# Altium PCB WUT-YJ-4-3-1.PcbDoc (part 11 of 11)
Units mm, origin at the board's own origin, x right, y up, seen from the top; angles counter-clockwise.
Board outline 85 x 56 mm, 4 copper layers (Top Layer, GND_Plane, 3V3_Plane, Bottom Layer); 182 components, 321 nets, 1106 pads, 360 vias.
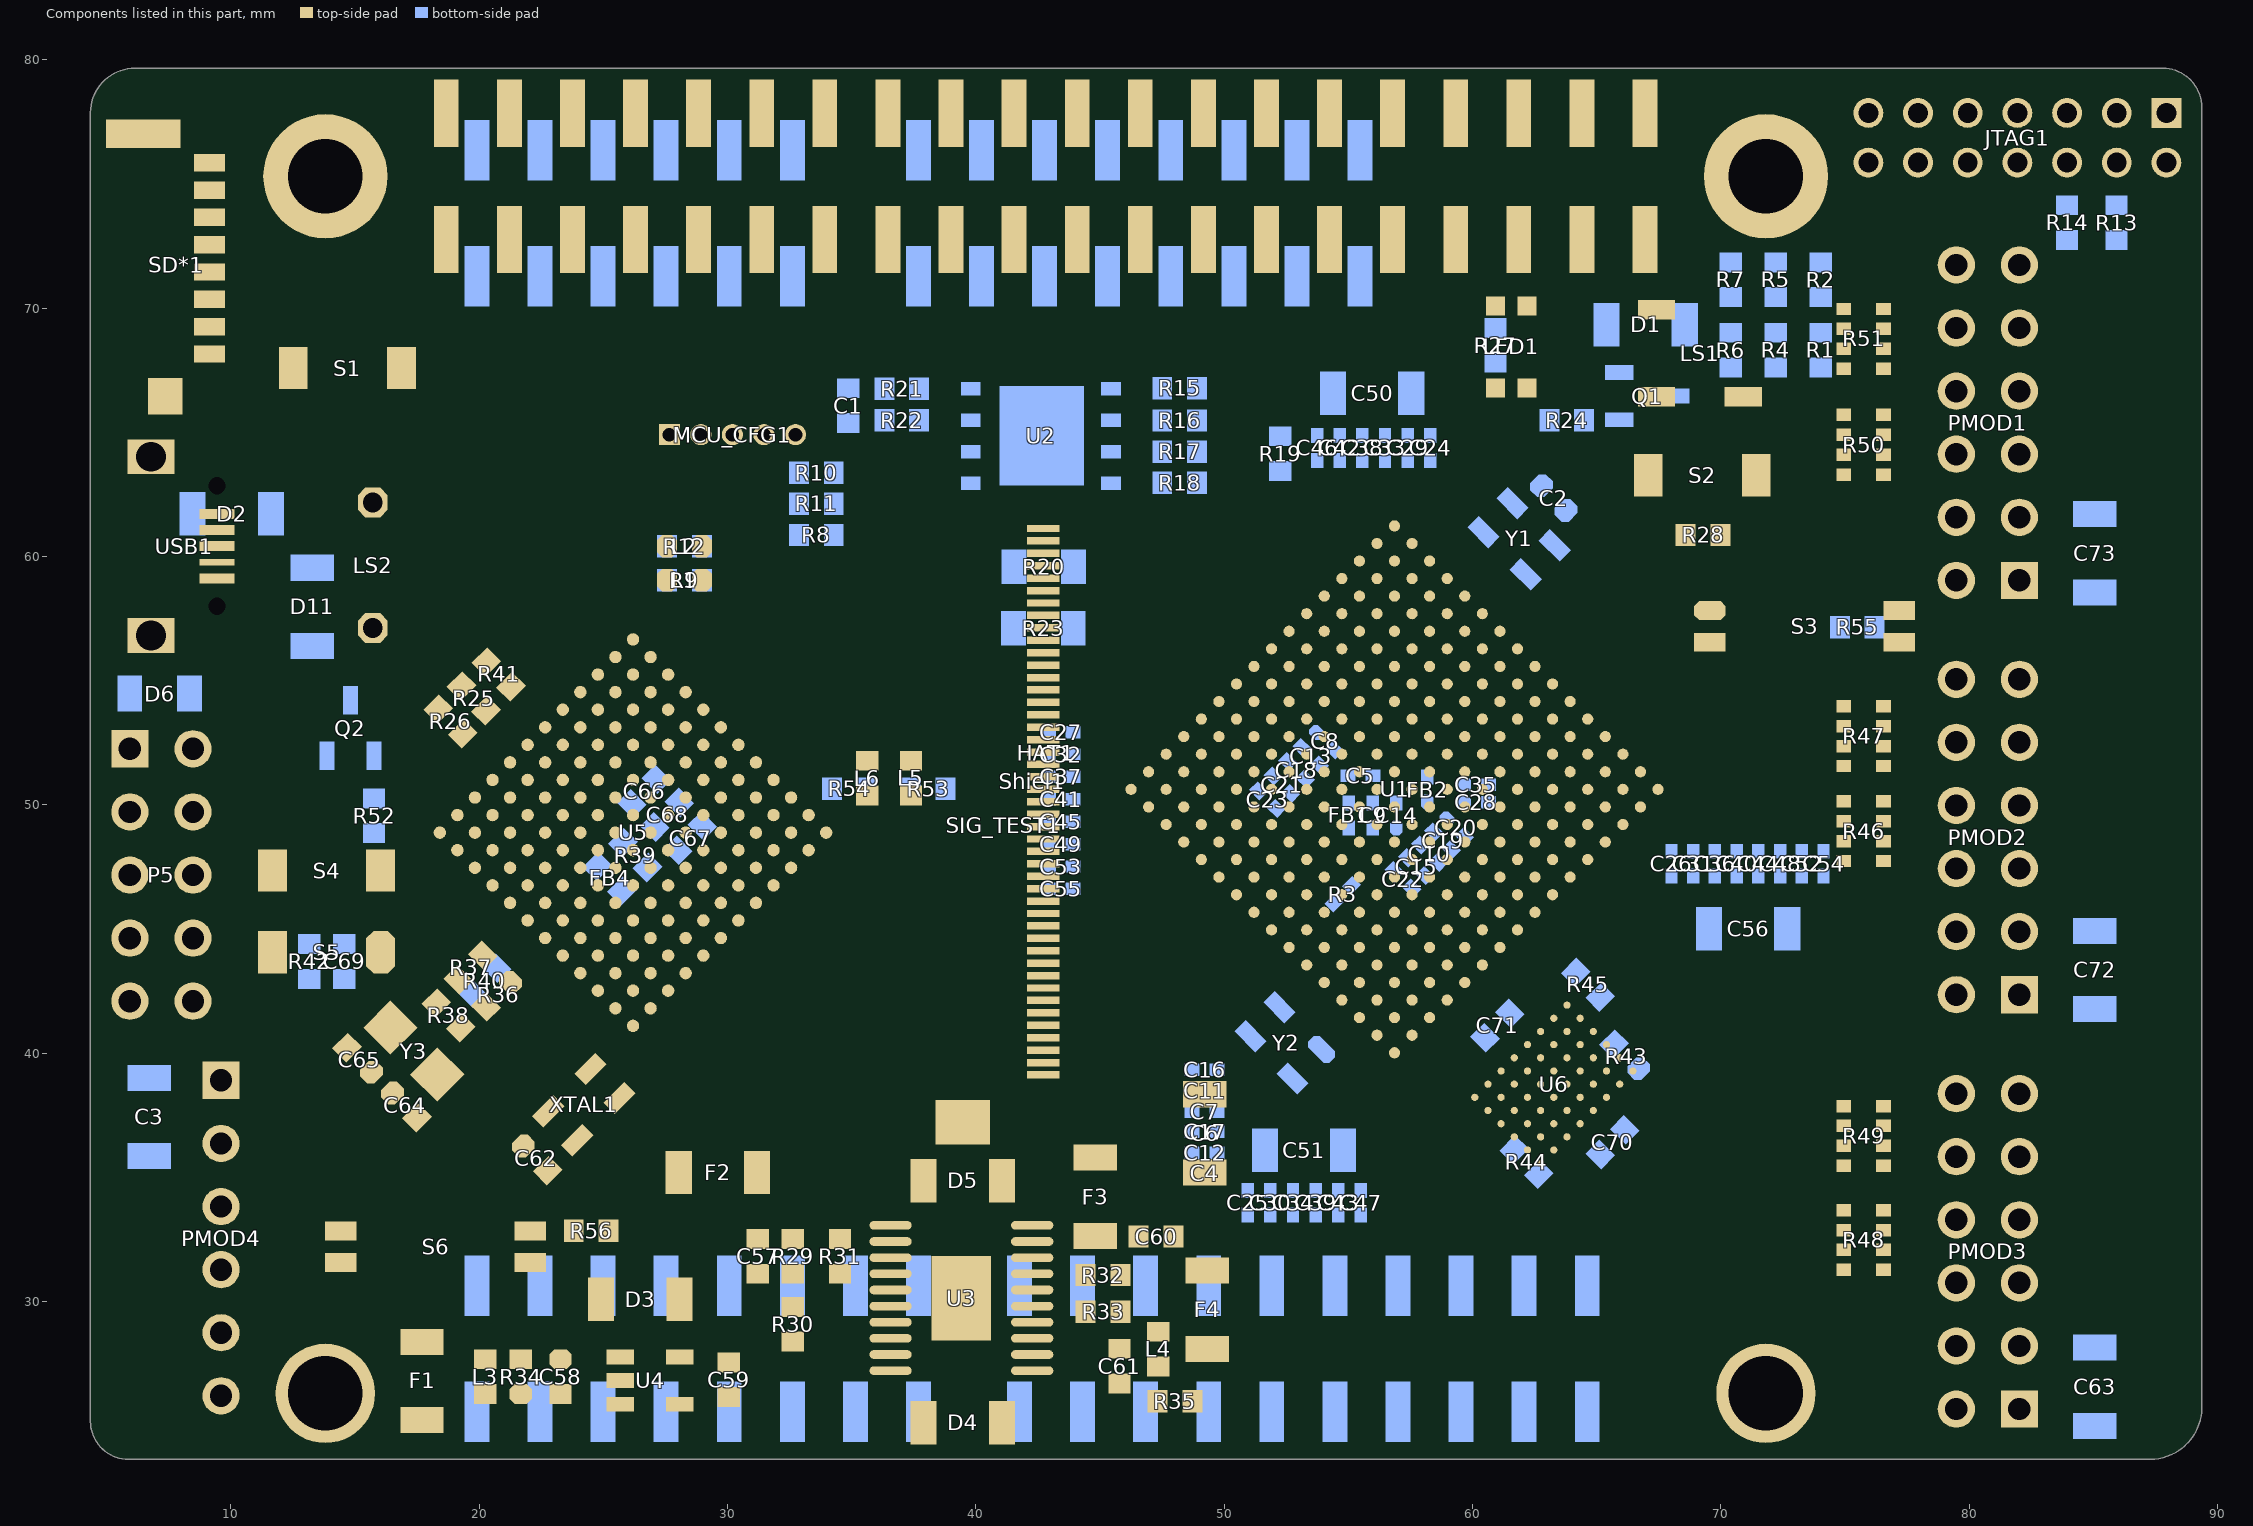
[diagram p13: the components of this part, seen from the top]

## Via types
v1: diameter 0.45, hole 0.2, Top Layer to Bottom Layer, tented both sides, 280 vias
v2: diameter 0.61, hole 0.33, Top Layer to Bottom Layer, tented both sides, 40 vias
v3: diameter 0.403, hole 0.2, Top Layer to Bottom Layer, tented both sides, 15 vias
v4: diameter 0.5, hole 0.2, Top Layer to Bottom Layer, tented both sides, 12 vias
v5: diameter 0.864, hole 0.508, Top Layer to Bottom Layer, tented both sides, 11 vias
v6: diameter 0.864, hole 0.381, Top Layer to Bottom Layer, tented both sides, 1 vias
v7: diameter 0.864, hole 0.356, Top Layer to Bottom Layer, tented both sides, 1 vias

## Nets (pads, with @x,y where several pads share a name; then routed paths per layer and width w, separated by ;. In a path a pad name is that pad's centre, name@x,y a point inside that pad or via, vN(x,y) a via of type N, cw(c..) or ccw(c..) an arc to the next point about the centre after c; other vN are vias at no path point) (continued)
copper on no net: (continued)
  Top Layer w0.025: 88.303,68.195 88.303,68.356 ; 88.303,68.754 88.303,68.813 ; 88.303,69.236 88.303,69.245 ; 88.303,70.481 88.303,70.692 ; 88.328,46.046 88.328,46.41 ; 88.328,47.646 88.328,47.832 ; 88.328,47.9 88.328,48.163 ; 88.328,49.094 88.328,49.356 ; 88.328,49.653 88.328,49.763 ; 88.328,50.948 88.328,51.084 ; 88.328,52.218 88.328,52.328 ; 88.328,52.879 88.328,53.039 ; 88.328,53.818 88.328,53.979 ; 88.328,55.317 88.328,55.529 ; 88.328,58.517 88.328,60.304 ; 88.328,64.537 88.328,64.673 ; 88.328,65.655 88.328,65.79 ; 88.328,67.839 88.328,68 ; 88.328,68.068 88.328,68.102 ; 88.328,68.195 88.328,68.356 ; 88.328,70.506 88.328,70.667 ; 88.354,46.046 88.354,46.385 ; 88.354,47.672 88.354,48.163 ; 88.354,49.094 88.354,49.356 ; 88.354,49.653 88.354,49.763 ; 88.354,50.923 88.354,51.084 ; 88.354,52.218 88.354,52.328 ; 88.354,52.904 88.354,53.09 ; 88.354,53.818 88.354,54.005 ; 88.354,55.317 88.354,55.529 ; 88.354,58.517 88.354,60.304 ; 88.354,64.537 88.354,64.673 ; 88.354,65.655 88.354,65.79 ; 88.354,67.865 88.354,68 ; 88.354,68.068 88.354,68.356 ; 88.354,70.532 88.354,70.642 ; 88.379,46.046 88.379,46.385 ; 88.379,47.697 88.379,48.137 ; 88.379,49.119 88.379,49.356 ; 88.379,49.653 88.379,49.763 ; 88.379,50.923 88.379,51.058 ; 88.379,52.218 88.379,52.328 ; 88.379,52.929 88.379,53.116 ; 88.379,53.818 88.379,54.03 ; 88.379,55.317 88.379,55.503 ; 88.379,58.517 88.379,60.304 ; 88.379,64.563 88.379,64.673 ; 88.379,65.655 88.379,65.79 ; 88.379,67.89 88.379,68 ; 88.379,68.093 88.379,68.356 ; 88.379,70.532 88.379,70.591 ; 88.405,46.071 88.405,46.359 ; 88.405,47.722 88.405,48.137 ; 88.405,49.119 88.405,49.331 ; 88.405,49.653 88.405,49.788 ; 88.405,50.72 88.405,50.779 ; 88.405,50.872 88.405,51.058 ; 88.405,52.244 88.405,52.303 ; 88.405,52.955 88.405,53.192 ; 88.405,53.818 88.405,54.055 ; 88.405,55.317 88.405,55.478 ; 88.405,58.543 88.405,59.339 ; 88.405,59.737 88.405,60.304 ; 88.405,64.563 88.405,64.673 ; 88.405,65.655 88.405,65.79 ; 88.405,67.915 88.405,67.949 ; 88.405,68.093 88.405,68.356 ; 88.43,46.097 88.43,46.334 ; 88.43,47.722 88.43,48.137 ; 88.43,49.119 88.43,49.331 ; 88.43,49.678 88.43,49.788 ; 88.43,50.745 88.43,51.058 ; 88.43,52.98 88.43,53.268 ; 88.43,53.818 88.43,54.055 ; 88.43,55.317 88.43,55.452 ; 88.43,58.543 88.43,59.059 ; 88.43,60.041 88.43,60.304 ; 88.43,64.588 88.43,64.647 ; 88.43,65.655 88.43,65.79 ; 88.43,68.093 88.43,68.356 ; 88.456,46.122 88.456,46.334 ; 88.456,47.773 88.456,48.137 ; 88.456,49.145 88.456,49.331 ; 88.456,49.678 88.456,49.788 ; 88.456,50.77 88.456,51.058 ; 88.456,53.006 88.456,53.37 ; 88.456,53.768 88.456,54.055 ; 88.456,55.317 88.456,55.452 ; 88.456,58.594 88.456,58.932 ; 88.456,64.613 88.456,64.647 ; 88.456,65.655 88.456,65.79 ; 88.456,68.119 88.456,68.356 ; 88.481,46.148 88.481,46.308 ; 88.481,47.799 88.481,48.137 ; 88.481,49.145 88.481,49.306 ; 88.481,49.704 88.481,49.788 ; 88.481,50.796 88.481,51.058 ; 88.481,53.031 88.481,53.395 ; 88.481,53.539 88.481,53.573 ; 88.481,53.691 88.481,54.055 ; 88.481,55.292 88.481,55.427 ; 88.481,58.619 88.481,58.831 ; 88.481,65.655 88.481,65.79 ; 88.481,68.119 88.481,68.356 ; 88.506,46.173 88.506,46.308 ; 88.506,47.849 88.506,48.112 ; 88.506,49.17 88.506,49.306 ; 88.506,49.704 88.506,49.788 ; 88.506,50.796 88.506,51.033 ; 88.506,53.056 88.506,54.055 ; 88.506,55.292 88.506,55.402 ; 88.506,65.655 88.506,65.79 ; 88.506,68.119 88.506,68.356 ; 88.532,46.224 88.532,46.283 ; 88.532,47.9 88.532,48.112 ; 88.532,49.17 88.532,49.306 ; 88.532,49.729 88.532,49.788 ; 88.532,50.821 88.532,51.033 ; 88.532,53.082 88.532,54.055 ; 88.532,55.266 88.532,55.376 ; 88.532,65.655 88.532,65.765 ; 88.532,68.144 88.532,68.33 ; 88.557,47.951 88.557,48.086 ; 88.557,49.196 88.557,49.306 ; 88.557,49.754 88.557,49.763 ; 88.557,50.847 88.557,51.033 ; 88.557,53.133 88.557,54.03 ; 88.557,55.241 88.557,55.351 ; 88.557,65.655 88.557,65.765 ; 88.557,68.144 88.557,68.33 ; 88.582,49.221 88.582,49.28 ; 88.582,50.847 88.582,51.007 ; 88.582,53.183 88.582,54.03 ; 88.582,55.215 88.582,55.325 ; 88.582,65.655 88.582,65.765 ; 88.582,68.169 88.582,68.33 ; 88.608,49.272 88.608,49.28 ; 88.608,50.872 88.608,51.007 ; 88.608,53.234 88.608,54.005 ; 88.608,55.19 88.608,55.3 ; 88.608,65.68 88.608,65.765 ; 88.608,68.169 88.608,68.33 ; 88.633,50.872 88.633,50.982 ; 88.633,53.285 88.633,53.979 ; 88.633,55.19 88.633,55.275 ; 88.633,65.68 88.633,65.765 ; 88.633,68.22 88.633,68.33 ; 88.659,50.897 88.659,50.982 ; 88.659,53.336 88.659,53.928 ; 88.659,55.165 88.659,55.249 ; 88.659,65.706 88.659,65.765 ; 88.659,68.246 88.659,68.33 ; 88.684,50.897 88.684,50.957 ; 88.684,53.412 88.684,53.878 ; 88.684,55.139 88.684,55.224 ; 88.684,65.706 88.684,65.739 ; 88.684,68.296 88.684,68.305 ; 88.709,53.539 88.709,53.725 ; 88.709,55.114 88.709,55.198 ; 88.735,55.088 88.735,55.148 ; 88.76,55.063 88.76,55.122 ; 88.786,55.088 88.786,55.097
  Top Layer w0.051: 50.961,29.934 51.283,29.934 ; 50.961,29.985 51.435,29.985 ; 50.961,30.035 51.791,30.035 ; 51.012,30.086 51.791,30.086 ; 51.113,30.797 51.384,30.797 ; 51.113,30.848 51.384,30.848 ; 51.164,28.765 51.689,28.765 ; 51.164,28.816 51.486,28.816 ; 51.164,28.867 51.384,28.867 ; 51.164,28.918 51.384,28.918 ; 51.164,28.969 51.435,28.969 ; 51.164,29.019 51.435,29.019 ; 51.164,29.07 51.486,29.07 ; 51.164,30.137 51.74,30.137 ; 51.164,30.696 51.486,30.696 ; 51.164,30.747 51.435,30.747 ; 51.164,30.899 51.333,30.899 ; 51.215,28.715 52.299,28.715 ; 51.215,29.121 51.486,29.121 ; 51.215,29.172 51.537,29.172 ; 51.215,30.594 51.537,30.594 ; 51.215,30.645 51.486,30.645 ; 51.266,28.664 53.213,28.664 ; 51.266,29.223 51.537,29.223 ; 51.266,29.273 51.587,29.273 ; 51.266,30.493 51.587,30.493 ; 51.266,30.543 51.537,30.543 ; 51.316,29.324 51.587,29.324 ; 51.316,29.375 51.638,29.375 ; 51.316,30.188 51.638,30.188 ; 51.316,30.391 51.587,30.391 ; 51.316,30.442 51.587,30.442 ; 51.367,28.613 53.67,28.613 ; 51.367,29.426 51.638,29.426 ; 51.367,29.477 51.689,29.477 ; 51.367,30.29 51.587,30.29 ; 51.367,30.34 51.587,30.34 ; 51.418,29.527 51.689,29.527 ; 51.469,29.578 51.74,29.578 ; 51.469,29.629 51.74,29.629 ; 51.52,29.68 51.791,29.68 ; 51.52,29.731 51.791,29.731 ; 51.52,29.781 51.791,29.781 ; 51.52,29.985 51.841,29.985 ; 51.57,28.562 53.721,28.562 ; 51.57,29.832 51.841,29.832 ; 51.57,29.883 51.841,29.883 ; 51.57,29.934 51.841,29.934 ; 51.875,30.29 52.451,30.29 ; 51.875,30.34 53.416,30.34 ; 51.875,30.391 53.416,30.391 ; 51.875,30.696 52.553,30.696 ; 51.926,28.867 52.502,28.867 ; 51.926,28.918 53.365,28.918 ; 51.926,28.969 53.518,28.969 ; 51.926,29.019 53.518,29.019 ; 51.926,29.07 52.197,29.07 ; 51.926,29.121 52.197,29.121 ; 51.926,29.172 52.197,29.172 ; 51.926,29.223 52.197,29.223 ; 51.926,29.273 52.197,29.273 ; 51.926,29.324 52.197,29.324 ; 51.926,29.375 52.349,29.375 ; 51.926,29.426 53.518,29.426 ; 51.926,29.477 53.518,29.477 ; 51.926,29.527 53.467,29.527 ; 51.926,29.578 53.416,29.578 ; 51.926,29.629 52.197,29.629 ; 51.926,29.68 52.197,29.68 ; 51.926,29.731 52.146,29.731 ; 51.926,29.781 52.197,29.781 ; 51.926,29.832 52.908,29.832 ; 51.926,29.883 53.416,29.883 ; 51.926,29.934 53.416,29.934 ; 51.926,29.985 53.416,29.985 ; 51.926,30.035 52.146,30.035 ; 51.926,30.086 52.146,30.086 ; 51.926,30.137 52.146,30.137 ; 51.926,30.188 52.146,30.188 ; 51.926,30.239 52.146,30.239 ; 51.926,30.442 53.365,30.442 ; 51.926,30.594 52.146,30.594 ; 51.926,30.645 52.349,30.645 ; 51.926,30.747 52.807,30.747 ; 51.977,28.816 52.146,28.816 ; 52.028,30.797 53.01,30.797 ; 52.129,28.511 53.721,28.511 ; 52.282,30.848 53.213,30.848 ; 52.332,30.493 53.264,30.493 ; 52.383,29.07 53.518,29.07 ; 52.485,30.899 53.264,30.899 ; 52.739,30.95 53.264,30.95 ; 52.79,30.035 53.416,30.035 ; 52.891,29.629 53.213,29.629 ; 52.942,31.001 53.264,31.001 ; 52.993,28.461 53.67,28.461 ; 53.145,30.29 53.416,30.29 ; 53.196,29.832 53.416,29.832 ; 53.196,30.086 53.467,30.086 ; 53.196,30.137 53.467,30.137 ; 53.196,30.188 53.467,30.188 ; 53.196,30.239 53.467,30.239 ; 53.247,29.121 53.518,29.121 ; 53.247,29.375 53.518,29.375 ; 53.298,29.172 53.518,29.172 ; 53.298,29.223 53.518,29.223 ; 53.298,29.273 53.518,29.273 ; 53.298,29.324 53.518,29.324 ; 54.11,28.562 54.432,28.562 ; 54.11,28.613 54.483,28.613 ; 54.11,29.883 54.534,29.883 ; 54.11,29.934 54.432,29.934 ; 54.11,29.985 54.331,29.985 ; 54.161,28.511 54.331,28.511 ; 54.161,28.664 54.534,28.664 ; 54.161,29.832 54.635,29.832 ; 54.161,30.34 56.667,30.34 ; 54.161,30.391 56.718,30.391 ; 54.161,30.442 56.718,30.442 ; 54.212,28.715 54.585,28.715 ; 54.212,29.781 54.686,29.781 ; 54.212,30.29 54.94,30.29 ; 54.263,28.765 54.686,28.765 ; 54.314,28.816 54.737,28.816 ; 54.314,29.731 54.788,29.731 ; 54.415,28.867 54.788,28.867 ; 54.415,29.68 54.839,29.68 ; 54.466,28.918 54.839,28.918 ; 54.466,29.629 54.889,29.629 ; 54.517,28.969 54.889,28.969 ; 54.568,29.019 54.94,29.019 ; 54.568,29.578 54.94,29.578 ; 54.568,30.493 56.718,30.493 ; 54.618,29.07 54.94,29.07 ; 54.618,29.527 54.94,29.527 ; 54.669,29.121 54.991,29.121 ; 54.669,29.477 54.991,29.477 ; 54.72,29.172 54.991,29.172 ; 54.72,29.223 54.991,29.223 ; 54.72,29.375 54.991,29.375 ; 54.72,29.426 54.991,29.426 ; 54.771,29.273 54.991,29.273 ; 54.771,29.324 54.991,29.324 ; 55.126,30.899 55.397,30.899 ; 55.126,30.95 55.397,30.95 ; 55.177,30.086 55.448,30.086 ; 55.177,30.137 55.448,30.137 ; 55.177,30.188 55.448,30.188 ; 55.177,30.239 55.448,30.239 ; 55.177,30.29 55.448,30.29 ; 55.177,30.543 55.448,30.543 ; 55.177,30.594 55.448,30.594 ; 55.177,30.645 55.448,30.645 ; 55.177,30.696 55.448,30.696 ; 55.177,30.747 55.397,30.747 ; 55.177,30.797 55.397,30.797 ; 55.177,30.848 55.397,30.848 ; 55.177,31.001 55.397,31.001 ; 55.228,29.223 55.499,29.223 ; 55.228,29.273 55.499,29.273 ; 55.228,29.324 55.499,29.324 ; 55.228,29.375 55.499,29.375 ; 55.228,29.426 55.499,29.426 ; 55.228,29.477 55.499,29.477 ; 55.228,29.527 55.499,29.527 ; 55.228,29.578 55.499,29.578 ; 55.228,29.629 55.499,29.629 ; 55.228,29.68 55.499,29.68 ; 55.228,29.731 55.499,29.731 ; 55.228,29.781 55.499,29.781 ; 55.228,29.832 55.499,29.832 ; 55.228,29.883 55.499,29.883 ; 55.228,29.934 55.448,29.934 ; 55.228,29.985 55.448,29.985 ; 55.228,30.035 55.448,30.035 ; 55.228,31.051 55.347,31.051 ; 55.279,28.41 55.55,28.41 ; 55.279,28.461 55.55,28.461 ; 55.279,28.511 55.55,28.511 ; 55.279,28.562 55.55,28.562 ; 55.279,28.613 55.55,28.613 ; 55.279,28.664 55.55,28.664 ; 55.279,28.715 55.55,28.715 ; 55.279,28.765 55.55,28.765 ; 55.279,28.816 55.55,28.816 ; 55.279,28.867 55.55,28.867 ; 55.279,28.918 55.55,28.918 ; 55.279,28.969 55.55,28.969 ; 55.279,29.019 55.499,29.019 ; 55.279,29.07 55.499,29.07 ; 55.279,29.121 55.499,29.121 ; 55.279,29.172 55.499,29.172 ; 55.33,28.359 55.55,28.359 ; 55.685,29.07 56.007,29.07 ; 55.685,29.121 55.956,29.121 ; 55.685,29.172 55.956,29.172 ; 55.685,29.223 55.956,29.223 ; 55.685,29.273 55.956,29.273 ; 55.685,29.324 55.956,29.324 ; 55.685,29.375 56.007,29.375 ; 55.736,28.969 56.21,28.969 ; 55.736,29.019 56.109,29.019 ; 55.736,29.426 56.007,29.426 ; 55.736,29.477 56.058,29.477 ; 55.787,29.527 56.109,29.527 ; 55.787,29.578 56.159,29.578 ; 55.838,28.918 56.312,28.918 ; 55.838,29.629 56.21,29.629 ; 55.888,28.867 56.464,28.867 ; 55.888,29.68 56.261,29.68 ; 55.939,29.731 56.312,29.731 ; 55.939,30.899 56.363,30.899 ; 55.939,30.95 56.261,30.95 ; 55.939,31.001 56.159,31.001 ; 55.99,28.816 56.566,28.816 ; 55.99,29.781 56.413,29.781 ; 55.99,30.848 56.464,30.848 ; 56.041,30.797 56.566,30.797 ; 56.092,28.765 56.718,28.765 ; 56.092,29.832 56.464,29.832 ; 56.142,29.883 56.515,29.883 ; 56.142,30.747 56.617,30.747 ; 56.193,28.715 56.82,28.715 ; 56.193,29.934 56.566,29.934 ; 56.244,29.985 56.566,29.985 ; 56.244,30.696 56.667,30.696 ; 56.295,30.035 56.566,30.035 ; 56.346,28.664 56.82,28.664 ; 56.346,30.086 56.515,30.086 ; 56.346,30.645 56.667,30.645 ; 56.447,28.613 56.82,28.613 ; 56.447,30.594 56.617,30.594 ; 56.6,28.562 56.769,28.562 ; 57.209,28.765 59.766,28.765 ; 57.209,28.816 59.817,28.816 ; 57.26,28.715 58.699,28.715 ; 57.26,28.867 59.868,28.867 ; 57.514,29.223 59.563,29.223 ; 57.514,29.273 59.563,29.273 ; 57.514,29.324 59.563,29.324 ; 57.514,29.375 59.563,29.375 ; 57.514,29.426 57.785,29.426 ; 57.514,29.477 57.785,29.477 ; 57.514,29.527 57.785,29.527 ; 57.514,29.578 57.785,29.578 ; 57.514,29.629 57.785,29.629 ; 57.514,29.68 57.785,29.68 ; 57.514,29.731 57.785,29.731 ; 57.514,29.781 57.785,29.781 ; 57.514,29.832 57.785,29.832 ; 57.514,29.883 57.785,29.883 ; 57.514,29.934 57.785,29.934 ; 57.514,29.985 57.785,29.985 ; 57.514,30.035 57.785,30.035 ; 57.514,30.086 57.785,30.086 ; 57.514,30.137 57.785,30.137 ; 57.514,30.188 58.496,30.188 ; 57.514,30.239 59.614,30.239 ; 57.514,30.29 59.563,30.29 ; 57.514,30.34 59.512,30.34 ; 57.565,30.391 57.734,30.391 ; 57.616,29.172 58.039,29.172 ; 58.022,29.68 58.903,29.68 ; 58.022,29.731 59.106,29.731 ; 58.022,29.781 59.157,29.781 ; 58.022,29.832 59.106,29.832 ; 58.073,28.918 59.817,28.918 ; 58.174,30.848 58.445,30.848 ; 58.174,30.899 58.445,30.899 ; 58.174,30.95 58.445,30.95 ; 58.174,31.001 58.445,31.001 ; 58.174,31.051 58.395,31.051 ; 58.225,30.543 58.496,30.543 ; 58.225,30.594 58.852,30.594 ; 58.225,30.645 59.512,30.645 ; 58.225,30.696 59.563,30.696 ; 58.225,30.747 59.563,30.747 ; 58.225,30.797 58.496,30.797 ; 58.276,30.391 59.411,30.391 ; 58.276,30.442 58.547,30.442 ; 58.276,30.493 58.496,30.493 ; 58.378,28.969 58.649,28.969 ; 58.378,29.019 58.649,29.019 ; 58.378,29.07 58.649,29.07 ; 58.378,29.121 58.649,29.121 ; 58.378,29.172 58.649,29.172 ; 58.428,28.359 58.699,28.359 ; 58.428,28.41 58.699,28.41 ; 58.428,28.461 58.699,28.461 ; 58.428,28.511 58.699,28.511 ; 58.428,28.562 58.699,28.562 ; 58.428,28.613 58.699,28.613 ; 58.428,28.664 58.699,28.664 ; 58.479,28.308 58.649,28.308 ; 58.682,29.883 59.055,29.883 ; 58.682,30.797 59.563,30.797 ; 59.292,29.121 59.512,29.121 ; 59.292,29.172 59.563,29.172 ; 59.292,29.426 59.563,29.426 ; 59.292,30.188 59.614,30.188 ; 59.343,29.477 59.563,29.477 ; 59.343,29.527 59.614,29.527 ; 59.343,29.578 59.614,29.578 ; 59.343,29.629 59.614,29.629 ; 59.343,29.68 59.614,29.68 ; 59.343,29.731 59.614,29.731 ; 59.343,29.781 59.614,29.781 ; 59.343,30.137 59.614,30.137 ; 59.394,29.832 59.614,29.832 ; 59.394,29.883 59.665,29.883 ; 59.394,29.934 59.665,29.934 ; 59.394,29.985 59.665,29.985 ; 59.394,30.035 59.665,30.035 ; 59.394,30.086 59.665,30.086 ; 59.495,28.969 59.766,28.969 ; 60.257,28.41 60.528,28.41 ; 60.257,28.461 60.528,28.461 ; 60.257,29.578 60.681,29.578 ; 60.257,29.629 61.087,29.629 ; 60.257,29.68 61.493,29.68 ; 60.308,28.359 60.528,28.359 ; 60.308,28.511 60.528,28.511 ; 60.308,28.562 60.579,28.562 ; 60.308,28.613 60.579,28.613 ; 60.308,28.664 62.357,28.664 ; 60.308,28.715 61.9,28.715 ; 60.308,29.731 61.849,29.731 ; 60.359,28.765 61.392,28.765 ; 60.359,28.816 61.087,28.816 ; 60.359,28.867 60.63,28.867 ; 60.359,28.918 60.63,28.918 ; 60.359,30.391 62.408,30.391 ; 60.359,30.442 61.493,30.442 ; 60.41,28.969 60.681,28.969 ; 60.41,29.019 60.681,29.019 ; 60.41,29.07 60.681,29.07 ; 60.41,29.121 60.681,29.121 ; 60.41,29.172 60.681,29.172 ; 60.41,30.34 62.916,30.34 ; 60.46,29.223 60.731,29.223 ; 60.46,29.273 60.731,29.273 ; 60.46,29.324 61.798,29.324 ; 60.46,29.375 61.443,29.375 ; 60.46,30.493 61.443,30.493 ; 60.511,29.426 60.681,29.426 ; 60.562,29.781 61.849,29.781 ; 60.714,30.29 61.036,30.29 ; 60.714,30.543 60.985,30.543 ; 60.714,30.594 60.985,30.594 ; 60.714,30.645 60.985,30.645 ; 60.714,30.696 60.985,30.696 ; 60.714,30.747 60.985,30.747 ; 60.714,30.797 60.985,30.797 ; 60.714,30.848 60.985,30.848 ; 60.765,28.613 62.865,28.613 ; 60.765,29.527 61.036,29.527 ; 60.765,29.578 61.036,29.578 ; 60.765,29.832 61.849,29.832 ; 60.765,29.883 61.036,29.883 ; 60.765,29.934 61.036,29.934 ; 60.765,29.985 61.036,29.985 ; 60.765,30.035 61.036,30.035 ; 60.765,30.086 61.036,30.086 ; 60.765,30.137 61.036,30.137 ; 60.765,30.188 61.036,30.188 ; 60.765,30.239 60.985,30.239 ; 60.765,30.899 60.935,30.899 ; 60.816,28.867 61.087,28.867 ; 60.816,28.918 61.087,28.918 ; 60.816,28.969 61.087,28.969 ; 60.816,29.019 61.087,29.019 ; 60.816,29.07 61.087,29.07 ; 60.816,29.121 61.087,29.121 ; 60.816,29.172 61.138,29.172 ; 60.816,29.223 61.798,29.223 ; 60.816,29.273 61.798,29.273 ; 60.816,29.426 61.036,29.426 ; 60.816,29.477 61.036,29.477 ; 61.222,28.562 63.017,28.562 ; 61.375,29.883 61.493,29.883 ; 61.527,29.07 61.798,29.07 ; 61.527,29.121 61.798,29.121 ; 61.527,29.172 61.798,29.172 ; 61.527,29.375 62.408,29.375 ; 61.527,29.426 62.408,29.426 ; 61.578,28.969 62.205,28.969 ; 61.578,29.019 62.205,29.019 ; 61.578,29.477 61.798,29.477 ; 61.578,29.527 61.849,29.527 ; 61.578,29.578 61.849,29.578 ; 61.578,29.629 61.849,29.629 ; 61.578,29.68 61.849,29.68 ; 61.578,30.29 62.967,30.29 ; 61.629,28.918 62.205,28.918 ; 61.629,29.883 61.9,29.883 ; 61.629,29.934 61.9,29.934 ; 61.629,29.985 61.9,29.985 ; 61.629,30.035 61.9,30.035 ; 61.629,30.086 61.9,30.086 ; 61.629,30.137 61.9,30.137 ; 61.629,30.239 62.967,30.239 ; 61.629,30.442 61.798,30.442 ; 61.68,28.867 62.103,28.867 ; 61.68,30.188 61.9,30.188 ; 61.73,28.511 63.017,28.511 ; 61.883,29.324 62.459,29.324 ; 61.934,29.477 62.408,29.477 ; 61.984,29.527 62.459,29.527 ; 62.035,29.07 62.154,29.07 ; 62.035,30.188 62.967,30.188 ; 62.035,30.442 62.306,30.442 ; 62.035,30.493 62.306,30.493 ; 62.035,30.543 62.306,30.543 ; 62.035,30.594 62.306,30.594 ; 62.035,30.645 62.306,30.645 ; 62.035,30.696 62.306,30.696 ; 62.035,30.747 62.306,30.747 ; 62.035,30.797 62.306,30.797 ; 62.035,30.848 62.306,30.848 ; 62.035,30.899 62.306,30.899 ; 62.035,30.95 62.306,30.95 ; 62.035,31.001 62.306,31.001 ; 62.035,31.051 62.255,31.051 ; 62.086,29.578 62.56,29.578 ; 62.086,29.68 62.713,29.68 ; 62.086,29.731 62.814,29.731 ; 62.086,29.781 62.865,29.781 ; 62.086,29.832 62.357,29.832 ; 62.086,29.883 62.357,29.883 ; 62.086,29.934 62.357,29.934 ; 62.086,29.985 62.357,29.985 ; 62.086,30.035 62.357,30.035 ; 62.086,30.086 62.306,30.086 ; 62.086,30.137 62.306,30.137 ; 62.137,29.629 62.611,29.629 ; 62.188,29.223 62.509,29.223 ; 62.188,29.273 62.459,29.273 ; 62.238,28.461 63.017,28.461 ; 62.238,29.121 62.56,29.121 ; 62.238,29.172 62.509,29.172 ; 62.289,29.019 62.967,29.019 ; 62.289,29.07 62.56,29.07 ; 62.34,28.969 62.967,28.969 ; 62.391,28.918 62.916,28.918 ; 62.391,30.848 62.763,30.848 ; 62.391,30.899 62.713,30.899 ; 62.442,28.867 62.865,28.867 ; 62.442,30.797 62.763,30.797 ; 62.442,30.95 62.662,30.95 ; 62.492,29.832 62.865,29.832 ; 62.492,30.747 62.814,30.747 ; 62.543,28.816 62.763,28.816 ; 62.543,30.696 62.865,30.696 ; 62.594,29.883 62.865,29.883 ; 62.594,30.645 62.916,30.645 ; 62.645,30.594 62.967,30.594 ; 62.696,29.07 62.967,29.07 ; 62.696,29.934 62.865,29.934 ; 62.696,30.543 63.017,30.543 ; 62.746,28.41 62.967,28.41 ; 62.746,30.493 63.068,30.493 ; 62.797,29.121 62.865,29.121 ; 62.797,30.391 63.017,30.391 ; 62.797,30.442 63.068,30.442 ; 63.661,29.934 63.983,29.934 ; 63.661,29.985 63.932,29.985 ; 63.661,30.035 63.932,30.035 ; 63.661,30.086 63.932,30.086 ; 63.661,30.137 63.932,30.137 ; 63.661,30.188 63.932,30.188 ; 63.661,30.239 63.932,30.239 ; 63.661,30.29 63.932,30.29 ; 63.661,30.34 63.932,30.34 ; 63.661,30.391 63.932,30.391 ; 63.712,28.867 64.389,28.867 ; 63.712,28.918 63.983,28.918 ; 63.712,28.969 63.983,28.969 ; 63.712,29.019 64.338,29.019 ; 63.712,29.781 64.338,29.781 ; 63.712,29.832 63.983,29.832 ; 63.712,29.883 63.983,29.883 ; 63.712,30.442 63.983,30.442 ; 63.712,30.493 64.338,30.493 ; 63.712,30.543 64.338,30.543 ; 63.762,28.765 64.338,28.765 ; 63.762,28.816 64.338,28.816 ; 63.762,29.07 64.338,29.07 ; 63.762,29.121 64.287,29.121 ; 63.762,29.68 64.287,29.68 ; 63.762,29.731 64.338,29.731 ; 63.762,30.594 64.287,30.594 ; 63.813,28.715 64.287,28.715 ; 63.813,29.172 64.287,29.172 ; 63.813,30.645 64.237,30.645 ; 63.864,30.696 64.186,30.696 ; 63.915,28.664 64.186,28.664 ; 63.915,29.223 64.186,29.223 ; 63.966,29.477 64.237,29.477 ; 63.966,30.747 64.084,30.747 ; 64.016,29.426 64.237,29.426 ; 64.016,29.527 64.287,29.527 ; 64.016,29.578 64.287,29.578 ; 64.016,29.629 64.287,29.629 ; 64.067,29.832 64.338,29.832 ; 64.067,29.883 64.389,29.883 ; 64.067,30.442 64.338,30.442 ; 64.118,28.918 64.389,28.918 ; 64.118,28.969 64.389,28.969 ; 64.118,29.934 64.389,29.934 ; 64.118,29.985 64.389,29.985 ; 64.118,30.035 64.389,30.035 ; 64.118,30.086 64.389,30.086 ; 64.118,30.137 64.389,30.137 ; 64.118,30.188 64.389,30.188 ; 64.118,30.239 64.389,30.239 ; 64.118,30.29 64.389,30.29 ; 64.118,30.34 64.389,30.34 ; 64.118,30.391 64.389,30.391 ; 66.76,29.934 67.081,29.934 ; 66.76,29.985 67.031,29.985 ; 66.76,30.035 67.031,30.035 ; 66.76,30.086 67.031,30.086 ; 66.76,30.137 67.031,30.137 ; 66.76,30.188 67.031,30.188 ; 66.76,30.239 67.031,30.239 ; 66.76,30.29 67.031,30.29 ; 66.76,30.34 67.031,30.34 ; 66.76,30.391 67.031,30.391 ; 66.81,28.867 67.488,28.867 ; 66.81,28.918 67.081,28.918 ; 66.81,28.969 67.081,28.969 ; 66.81,29.019 67.437,29.019 ; 66.81,29.781 67.437,29.781 ; 66.81,29.832 67.081,29.832 ; 66.81,29.883 67.081,29.883 ; 66.81,30.442 67.081,30.442 ; 66.81,30.493 67.437,30.493 ; 66.81,30.543 67.437,30.543 ; 66.861,28.765 67.437,28.765 ; 66.861,28.816 67.437,28.816 ; 66.861,29.07 67.437,29.07 ; 66.861,29.121 67.386,29.121 ; 66.861,29.68 67.386,29.68 ; 66.861,29.731 67.437,29.731 ; 66.861,30.594 67.386,30.594 ; 66.912,28.715 67.386,28.715 ; 66.912,29.172 67.386,29.172 ; 66.912,30.645 67.335,30.645 ; 66.963,30.696 67.285,30.696 ; 67.014,28.664 67.285,28.664 ; 67.014,29.223 67.285,29.223 ; 67.064,29.477 67.335,29.477 ; 67.064,30.747 67.183,30.747 ; 67.115,29.426 67.335,29.426 ; 67.115,29.527 67.386,29.527 ; 67.115,29.578 67.386,29.578 ; 67.115,29.629 67.386,29.629 ; 67.166,29.832 67.437,29.832 ; 67.166,29.883 67.488,29.883 ; 67.166,30.442 67.437,30.442 ; 67.217,28.918 67.488,28.918 ; 67.217,28.969 67.488,28.969 ; 67.217,29.934 67.488,29.934 ; 67.217,29.985 67.488,29.985 ; 67.217,30.035 67.488,30.035 ; 67.217,30.086 67.488,30.086 ; 67.217,30.137 67.488,30.137 ; 67.217,30.188 67.488,30.188 ; 67.217,30.239 67.488,30.239 ; 67.217,30.29 67.488,30.29 ; 67.217,30.34 67.488,30.34 ; 67.217,30.391 67.488,30.391 ; 69.858,29.934 70.18,29.934 ; 69.858,29.985 70.129,29.985 ; 69.858,30.035 70.129,30.035 ; 69.858,30.086 70.129,30.086 ; 69.858,30.137 70.129,30.137 ; 69.858,30.188 70.129,30.188 ; 69.858,30.239 70.129,30.239 ; 69.858,30.29 70.129,30.29 ; 69.858,30.34 70.129,30.34 ; 69.858,30.391 70.129,30.391 ; 69.909,28.867 70.587,28.867 ; 69.909,28.918 70.18,28.918 ; 69.909,28.969 70.18,28.969 ; 69.909,29.019 70.536,29.019 ; 69.909,29.781 70.536,29.781 ; 69.909,29.832 70.18,29.832 ; 69.909,29.883 70.18,29.883 ; 69.909,30.442 70.18,30.442 ; 69.909,30.493 70.536,30.493 ; 69.909,30.543 70.536,30.543 ; 69.96,28.765 70.536,28.765 ; 69.96,28.816 70.536,28.816 ; 69.96,29.07 70.536,29.07 ; 69.96,29.121 70.485,29.121 ; 69.96,29.68 70.485,29.68 ; 69.96,29.731 70.536,29.731 ; 69.96,30.594 70.485,30.594 ; 70.011,28.715 70.485,28.715 ; 70.011,29.172 70.485,29.172 ; 70.011,30.645 70.434,30.645 ; 70.062,30.696 70.383,30.696 ; 70.112,28.664 70.383,28.664 ; 70.112,29.223 70.383,29.223 ; 70.163,29.477 70.434,29.477 ; 70.163,30.747 70.282,30.747 ; 70.214,29.426 70.434,29.426 ; 70.214,29.527 70.485,29.527 ; 70.214,29.578 70.485,29.578 ; 70.214,29.629 70.485,29.629 ; 70.265,29.832 70.536,29.832 ; 70.265,29.883 70.587,29.883 ; 70.265,30.442 70.536,30.442 ; 70.316,28.918 70.587,28.918 ; 70.316,28.969 70.587,28.969 ; 70.316,29.934 70.587,29.934 ; 70.316,29.985 70.587,29.985 ; 70.316,30.035 70.587,30.035 ; 70.316,30.086 70.587,30.086 ; 70.316,30.137 70.587,30.137 ; 70.316,30.188 70.587,30.188 ; 70.316,30.239 70.587,30.239 ; 70.316,30.29 70.587,30.29 ; 70.316,30.34 70.587,30.34 ; 70.316,30.391 70.587,30.391
  Top Layer w0.127: 51.393,26.759 53.34,26.759 ; 51.393,26.886 52.959,26.886 ; 51.393,27.013 52.578,27.013 ; 51.52,25.362 53.594,25.362 ; 51.647,26.632 51.816,26.632 ; 51.774,25.489 52.324,25.489 ; 51.901,25.235 53.467,25.235 ; 52.028,25.616 52.324,25.616 ; 52.028,25.743 52.324,25.743 ; 52.028,25.87 52.324,25.87 ; 52.028,25.997 52.324,25.997 ; 52.028,26.124 52.324,26.124 ; 52.028,26.251 52.324,26.251 ; 52.028,26.632 53.467,26.632 ; 52.155,24.981 52.959,24.981 ; 52.155,25.108 53.213,25.108 ; 52.155,26.378 52.451,26.378 ; 52.155,26.505 52.451,26.505 ; 52.282,24.854 52.832,24.854 ; 52.79,25.489 53.721,25.489 ; 53.044,25.616 53.721,25.616 ; 53.171,25.743 53.848,25.743 ; 53.171,26.505 53.594,26.505 ; 53.298,25.87 53.848,25.87 ; 53.425,25.997 53.848,25.997 ; 53.425,26.124 53.848,26.124 ; 53.552,26.251 53.848,26.251 ; 53.552,26.378 53.721,26.378 ; 54.06,26.759 56.007,26.759 ; 54.06,26.886 55.626,26.886 ; 54.06,27.013 55.245,27.013 ; 54.187,25.362 56.261,25.362 ; 54.314,26.632 54.483,26.632 ; 54.441,25.489 54.991,25.489 ; 54.568,25.235 56.134,25.235 ; 54.695,25.616 54.991,25.616 ; 54.695,25.743 54.991,25.743 ; 54.695,25.87 54.991,25.87 ; 54.695,25.997 54.991,25.997 ; 54.695,26.124 54.991,26.124 ; 54.695,26.251 54.991,26.251 ; 54.695,26.632 56.134,26.632 ; 54.822,24.981 55.626,24.981 ; 54.822,25.108 55.88,25.108 ; 54.822,26.378 55.118,26.378 ; 54.822,26.505 55.118,26.505 ; 54.949,24.854 55.499,24.854 ; 55.457,25.489 56.388,25.489 ; 55.711,25.616 56.388,25.616 ; 55.838,25.743 56.515,25.743 ; 55.838,26.505 56.261,26.505 ; 55.965,25.87 56.515,25.87 ; 56.092,25.997 56.515,25.997 ; 56.092,26.124 56.515,26.124 ; 56.219,26.251 56.515,26.251 ; 56.219,26.378 56.388,26.378 ; 56.981,25.235 57.404,25.235 ; 56.981,25.362 57.404,25.362 ; 56.981,25.489 57.404,25.489 ; 57.108,24.981 57.404,24.981 ; 57.108,25.108 57.404,25.108 ; 57.108,25.616 57.404,25.616 ; 57.108,25.743 57.912,25.743 ; 57.108,25.87 58.039,25.87 ; 57.108,25.997 57.531,25.997 ; 57.108,26.124 57.531,26.124 ; 57.108,26.251 57.531,26.251 ; 57.108,26.378 57.531,26.378 ; 57.108,26.505 57.531,26.505 ; 57.108,26.632 57.658,26.632 ; 57.108,27.013 57.531,27.013 ; 57.235,24.854 57.404,24.854 ; 57.235,26.759 57.658,26.759 ; 57.235,26.886 57.531,26.886 ; 57.235,27.14 57.404,27.14 ; 57.616,25.616 58.166,25.616 ; 57.743,25.489 58.293,25.489 ; 57.87,25.362 58.42,25.362 ; 57.87,25.997 58.166,25.997 ; 57.997,25.235 58.674,25.235 ; 57.997,26.124 58.293,26.124 ; 57.997,26.251 58.42,26.251 ; 58.124,26.378 58.801,26.378 ; 58.251,25.108 58.801,25.108 ; 58.251,26.505 58.801,26.505 ; 58.251,26.632 58.928,26.632 ; 58.378,24.981 58.928,24.981 ; 58.378,26.759 58.928,26.759 ; 58.505,26.886 58.928,26.886 ; 58.632,24.854 58.928,24.854 ; 58.632,27.013 58.801,27.013

## Polygon pours and split planes (outlines as drawn)
GND on GND_Plane (split plane): 87.928,79.143 88.063,79.116 88.194,79.071 88.319,79.01 88.434,78.933 88.538,78.842 88.629,78.738 88.706,78.623 88.767,78.498 88.812,78.367 88.839,78.232 88.847,78.107 88.846,78.093 88.846,25.729 88.847,25.714 88.838,25.554 88.809,25.382 88.76,25.214 88.693,25.052 88.609,24.899 88.507,24.756 88.391,24.625 88.26,24.509 88.118,24.407 87.964,24.323 87.803,24.256 87.634,24.207 87.462,24.178 87.302,24.169 87.287,24.171 5.88,24.171 5.867,24.169 5.748,24.177 5.617,24.203 5.491,24.246 5.372,24.305 5.262,24.378 5.162,24.466 5.074,24.566 5.001,24.676 4.942,24.795 4.899,24.921 4.873,25.052 4.865,25.171 4.867,25.184 4.867,77.876 4.865,77.889 4.873,78.019 4.897,78.16 4.936,78.298 4.991,78.43 5.06,78.555 5.143,78.671 5.238,78.778 5.345,78.873 5.461,78.956 5.587,79.025 5.719,79.08 5.856,79.12 5.997,79.144 6.127,79.151 6.14,79.15 87.789,79.15 87.803,79.151
3V3 on 3V3_Plane (split plane): 87.928,79.143 88.063,79.116 88.194,79.071 88.319,79.01 88.434,78.933 88.538,78.842 88.629,78.738 88.706,78.623 88.767,78.498 88.812,78.367 88.839,78.232 88.847,78.107 88.846,78.093 88.846,25.729 88.847,25.714 88.838,25.554 88.809,25.382 88.76,25.214 88.693,25.052 88.609,24.899 88.507,24.756 88.391,24.625 88.26,24.509 88.118,24.407 87.964,24.323 87.803,24.256 87.634,24.207 87.462,24.178 87.302,24.169 87.287,24.171 5.88,24.171 5.867,24.169 5.748,24.177 5.617,24.203 5.491,24.246 5.372,24.305 5.262,24.378 5.162,24.466 5.074,24.566 5.001,24.676 4.942,24.795 4.899,24.921 4.873,25.052 4.865,25.171 4.867,25.184 4.867,77.876 4.865,77.889 4.873,78.019 4.897,78.16 4.936,78.298 4.991,78.43 5.06,78.555 5.143,78.671 5.238,78.778 5.345,78.873 5.461,78.956 5.587,79.025 5.719,79.08 5.856,79.12 5.997,79.144 6.127,79.151 6.14,79.15 87.789,79.15 87.803,79.151

## Keep-outs
Keep-Out Layer:
  the board outline again, w0.254

## Other copper
Top Layer:
  rectangle net GND: 26.505,25.514 30.493,26.543
  rectangle net GND: 26.505,25.616 29.4,27.127

## Silkscreen, mask and mechanical layers (free items; w line width, h text height)
Top Overlay:
  drawing of 731 lines, arcs and shapes, not listed
  text "BANK34" at 15.151,78.257 h0.76
  text "5V" at 18.301,75.819 h0.76
  text "PL-N14" at 25.298,75.809 h0.76
  text "PL-N13" at 27.953,75.809 h0.76
  text "PL-P15" at 30.378,75.809 h0.76
  text "PL-T15" at 35.408,75.809 h0.76
  text "PL-T14" at 38.011,75.809 h0.76
  text "PL-T13" at 42.901,75.809 h0.76
  text "PL-R12" at 45.771,75.806 h0.76
  text "PL-T12" at 48.362,75.806 h0.76
  text "PL-P11" at 50.876,75.809 h0.76
  text "PL-T10" at 55.842,75.806 h0.76
  text "PL-P9" at 60.896,75.806 h0.76
  text "PL-T8" at 63.449,75.809 h0.76
  text "PL-R8" at 65.888,75.809 h0.76
  text "5V" at 20.841,75.781 h0.76
  text "GND" at 41.008,75.565 h0.76
  text "PS-E0" at 5.728,75.527 h0.76
  text "GND" at 28.296,75.108 h0.76
  text "GND" at 48.641,75.108 h0.76
  text "GND" at 66.396,75.095 h0.76
  text "GND" at 33.363,75.032 h0.76
  text "GND" at 53.734,75.019 h0.76
  text "GND" at 58.826,75.019 h0.76
  text "GND" at 23.228,74.993 h0.76
  text "PS-E1" at 5.728,74.433 h0.76
  text "3V3" at 18.148,74.27 h0.76
  text "3V3" at 38.456,74.295 h0.76
  text "PL-R15" at 35.458,74.245 h0.76
  text "PL-M16" at 20.066,74.244 h0.76
  text "PL-M14" at 22.809,74.238 h0.76
  text "PL-N16" at 25.311,74.244 h0.76
  text "PL-P16" at 30.124,74.244 h0.76
  text "PL-R16" at 32.995,74.244 h0.76
  text "PL-P14" at 40.653,74.238 h0.76
  text "PL-P13" at 43.205,74.243 h0.76
  text "PL-R13" at 45.707,74.243 h0.76
  text "PL-N12" at 50.47,74.238 h0.76
  text "PL-R11" at 53.213,74.238 h0.76
  text "PL-P10" at 55.918,74.242 h0.76
  text "PL-R10" at 58.56,74.242 h0.76
  text "PL-T9" at 61.163,74.244 h0.76
  text "PL-N9" at 63.462,74.244 h0.76
  text "GND" at 6.261,73.114 h0.76 r90
  text "PS-E2" at 5.728,72.245 h0.76
  text "PL-P6" at 84.1,71.514 h0.76
  text "PL-P8" at 86.604,71.514 h0.76
  text "PL-M12" at 68.161,71.183 h0.76
  text "3V3" at 6.261,70.917 h0.76 r90
  text "B" at 62.014,70.65 h0.76
  text "PS-E3" at 5.728,70.056 h0.76
  text "May the Force be with You ! ! !" at 13.525,69.532 h2.54
  text "PS-E4" at 5.728,68.962 h0.76
  text "PL-T5" at 84.124,68.974 h0.76
  text "PL-T7" at 86.604,68.968 h0.76
  text "PL-K13" at 63.754,68.516 h0.76 r90
  text "PS-E5" at 5.728,67.869 h0.76
  text "PL-R5" at 84.124,66.434 h0.76
  text "PL-R7" at 86.604,66.428 h0.76
  text "PL-L14" at 59.931,66.078 h0.76 r90
  text "PL-L13" at 63.767,65.989 h0.76 r90
  text "G" at 62.027,65.278 h0.76
  text "R" at 60.795,65.265 h0.76
  text "PROG" at 13.868,65.176 h0.76
  text "PL-M6" at 84.1,63.894 h0.76
  text "PL-R6" at 86.604,63.894 h0.76
  text "PL-K12" at 66.027,62.166 h0.76 r90
  text ">" at 28.143,60.147 h0.76
  text "BANK14" at 77.559,59.703 h0.76 r90
  text "1K" at 68.91,59.652 h0.76
  text ">" at 28.169,58.776 h0.76
  text "PL-P5" at 68.453,58.534 h0.76
  text "10K" at 21.196,55.689 h0.76
  text "0R" at 18.199,55.334 h0.76
  text "PL-N4" at 68.425,55.194 h0.76
  text "PL-T3" at 84.126,55.054 h0.76
  text "PL-T4" at 86.604,55.054 h0.76
  text "0R" at 17.348,54.483 h0.76
  text "PS-E26" at 13.995,54.064 h0.76
  text ">" at 37.02,53.023 h1.02 r270
  text ">" at 36.017,52.603 h1.02 r90
  text "PL-R3" at 84.126,52.465 h0.76
  text "PL-M5" at 86.604,52.47 h0.76
  text "PL-T2" at 84.125,49.871 h0.76
  text "PL-N3" at 86.604,49.877 h0.76
  text "PS-E27" at 12.687,49.263 h0.76
  text "PL-R2" at 84.125,47.282 h0.76
  text "PL-M4" at 86.604,47.282 h0.76
  text "0R" at 18.948,44.425 h0.76
  text "0R" at 21.958,42.024 h0.76
  text "BANK34" at 77.554,41.554 h0.76 r90
  text "PS-RST" at 12.687,41.212 h0.76
  text "1M" at 19.723,39.878 h0.76
  text "12pF" at 13.602,38.519 h0.76
  text "50MHz" at 22.492,38.532 h0.76 r45
  text "PL-N2" at 84.125,38.29 h0.76
  text "PL-P1" at 86.604,38.293 h0.76
  text "12pF" at 15.227,36.805 h0.76
  text "C" at 49.073,36.563 h0.76
  text "C" at 21.971,35.7 h0.76 r315
  text "PL-N1" at 84.232,35.695 h0.76
  text "PL-P4" at 86.604,35.697 h0.76
  text "F" at 29.477,34.963 h0.76
  text "<" at 39.281,34.633 h0.76
  text "F" at 44.666,33.934 h0.76
  text "0R" at 24.105,33.617 h0.76
  text "DAC" at 5.651,33.566 h0.76
  text "PS-A6" at 13.373,33.528 h0.76
  text "10uF" at 32.004,33.21 h0.76
  text "20K" at 33.998,33.21 h0.76
  text "20K" at 30.721,33.185 h0.76
  text "PL-M2" at 84.125,33.1 h0.76
  text "PL-P3" at 86.604,33.106 h0.76
  text "C" at 47.104,32.334 h0.76
  text "PS-E24" at 5.651,31.013 h0.76
  text "25K" at 46.507,30.81 h0.76
  text "PL-M1" at 84.232,30.505 h0.76
  text "PL-P1" at 86.604,30.505 h0.76
  text "PS-A7" at 13.297,30.315 h0.76
  text "<" at 26.086,29.858 h0.76
  text "250K" at 46.52,29.515 h0.76
  text "F" at 49.187,29.451 h0.76
  text "2K" at 31.852,28.765 h0.76 r90
  text "PS-E25" at 5.651,28.461 h0.76
  text "1K" at 21.323,28.359 h0.76
  text ">" at 47.053,28.181 h0.76 r270
  text "C" at 46.025,27.241 h0.76 r90
  text ">" at 20.523,26.848 h0.76 r90
  text "C" at 23.546,26.797 h0.76 r90
  text "C" at 30.328,26.657 h0.76 r90
  text "F" at 17.551,26.556 h0.76
  text "RTC" at 5.651,25.908 h0.76
  text "YJ 4-3-0" at 87.884,24.994 h1 r90
  text "<" at 39.281,24.841 h0.76
  text "10R" at 47.485,24.689 h0.76
  text "BANK34" at 77.554,24.625 h0.76 r90
Bottom Overlay:
  text "ADC" at 20.46,74.397 h0.76
  text "ADC" at 22.997,74.397 h0.76
  text "ADC" at 25.535,74.397 h0.76
  text "ADC" at 28.072,74.397 h0.76
  text "ADC" at 30.61,74.397 h0.76
  text "ADC" at 33.147,74.397 h0.76
  text "5V" at 38.011,74.289 h0.76
  text "GND" at 40.754,74.283 h0.76
  text "GND" at 43.294,74.283 h0.76
  text "5V" at 45.618,74.289 h0.76
  text "3V3" at 48.425,74.282 h0.76
  text "3V3" at 53.416,74.282 h0.76
  text "GND" at 56.032,74.283 h0.76
  text "10K" at 85.217,74.041 h0.76 r90
  text "DAC" at 20.436,72.962 h0.76
  text "ADC" at 22.997,72.962 h0.76
  text "ADC" at 25.535,72.962 h0.76
  text "ADC" at 28.072,72.962 h0.76
  text "ADC" at 30.61,72.962 h0.76
  text "ADC" at 33.147,72.962 h0.76
  text "PS-E8" at 38.621,72.949 h0.76
  text "PS-E9" at 41.106,72.949 h0.76
  text "PS-E10" at 43.982,72.949 h0.76
  text "PS-E6" at 46.114,72.949 h0.76
  text "PS-E7" at 48.594,72.949 h0.76
  text "PS-E12" at 51.45,72.949 h0.76
  text "PS-E11" at 53.832,72.949 h0.76
  text "PS-E28" at 56.439,72.949 h0.76
  text "~~" at 70.752,70.561 h0.76
  text "~~" at 72.581,70.574 h0.76
  text ">" at 67.081,69.113 h1.02
  text "1K" at 62.37,68.212 h0.76
  text "~~" at 74.371,67.716 h0.76
  text "1.8K" at 37.694,67.564 h0.76
  text "4.7K" at 51.537,66.484 h0.76
  text "C" at 56.172,66.307 h1.02
  text "1K" at 72.542,66.23 h0.76
  text "2K" at 64.135,66.129 h0.76
  text "C" at 34.582,65.926 h0.76 r270
  text "100R" at 51.156,65.189 h0.76
  text "100R" at 37.744,64.11 h0.76
  text "100R" at 51.156,63.995 h0.76
  text "C" at 59.131,63.983 h1.02
  text "100MHz" at 60.935,63.284 h0.76 r45
  text "4.7K" at 36.487,63.03 h0.76
  text "1.8K" at 51.156,62.7 h0.76
  text "C" at 62.954,62.293 h0.76 r315
  text ">" at 9.957,62.065 h1.02 r180
  text "1K" at 52.718,61.951 h1.02
  text "4.7K" at 36.487,61.9 h0.76
  text "200R" at 36.488,60.604 h0.76
  text "100R" at 31.128,60.173 h0.76
  text "C" at 85.357,59.83 h1.02
  text "100R" at 31.128,58.725 h0.76
  text "49.9" at 45.199,58.674 h0.76 r270
  text ">" at 12.916,57.861 h1.02 r270
  text "1K" at 75.806,57.887 h0.76
  text "100R" at 45.136,56.401 h0.76 r270
  text "<" at 6.82,54.864 h1.02 r180
  text "C" at 43.624,52.908 h1.02
  text "2K" at 35.319,51.524 h0.76
  text "2K" at 38.468,51.537 h0.76
  text "2K" at 15.024,49.987 h0.76 r90
  text "0R" at 25.324,48.933 h0.76
  text "FB" at 24.016,48.489 h0.76
  text "4.7K" at 54.864,47.371 h0.76 r45
  text "C" at 74.727,47.371 h1.02
  text "10K" at 13.652,45.225 h0.76
  text "C" at 14.834,45.225 h0.76
  text "C" at 71.298,44.615 h1.02
  text "10K" at 65.977,43.523 h0.76
  text "10K" at 20.002,43.243 h0.76
  text "C" at 85.293,43.066 h1.02
  text "C" at 61.189,40.856 h0.76
  text "10K" at 67.704,40.576 h0.76
  text "C" at 49.378,39.814 h1.02
  text "C" at 6.947,37.097 h1.02
  text "C" at 65.811,36.144 h0.76
  text "C" at 53.34,35.776 h1.02
  text "10K" at 61.722,34.569 h0.76
  text "C" at 56.286,33.731 h1.02
  text "PS-A29" at 42.913,28.816 h0.76
  text "PS-B1" at 45.237,28.804 h0.76
  text "PS-B3" at 47.904,28.791 h0.76
  text "PS-B5" at 50.33,28.791 h0.76
  text "PL-A7" at 52.908,28.791 h0.76
  text "PS-A9" at 20.942,28.753 h0.76
  text "PS-A11" at 23.684,28.756 h0.76
  text "PS-A19" at 26.265,28.753 h0.76
  text "PS-A15" at 28.737,28.756 h0.76
  text "PS-A17" at 31.222,28.756 h0.76
  text "PS-A13" at 38.621,28.755 h0.76
  text "PL-D6" at 55.423,28.765 h0.76
  text "PL-C6" at 57.975,28.765 h0.76
  text "PS-A25" at 33.68,28.752 h0.76
  text "PS-A12" at 36.149,28.752 h0.76
  text "PL-E6" at 60.376,28.727 h0.76
  text "PL-K5" at 63.068,28.702 h0.76
  text "PL-L5" at 65.481,28.626 h0.76
  text "PS-A16" at 33.68,27.94 h0.76
  text "PS-A8" at 20.948,27.127 h0.76
  text "PS-A10" at 23.684,27.127 h0.76
  text "PS-A5" at 26.265,27.128 h0.76
  text "PS-A14" at 28.737,27.127 h0.76
  text "PS-A24" at 31.222,27.127 h0.76
  text "PS-A26" at 36.175,27.127 h0.76
  text "PS-A27" at 38.636,27.127 h0.76
  text "PS-A28" at 42.951,27.14 h0.76
  text "PS-B0" at 45.225,27.153 h0.76
  text "PS-B2" at 48.057,27.14 h0.76
  text "PS-B4" at 50.267,27.14 h0.76
  text "PL-B7" at 52.883,27.127 h0.76
  text "PL-C7" at 55.448,27.114 h0.76
  text "PL-B6" at 57.925,27.114 h0.76
  text "PL-D5" at 60.376,27.102 h0.76
  text "PL-F5" at 63.005,27.038 h0.76
  text "PL-L4" at 65.456,27.038 h0.76
  text "C" at 85.293,26.251 h1.02

## Text inside footprints (layer, text, board x,y; h text height)
LS1: Top Overlay "+" at 67.246,67.297 h0.76